# Altium PCB FlightController_20x20.PcbDoc
Units mm, origin at the board's own origin, x right, y up, seen from the top; angles counter-clockwise.
Board outline 26 x 26 mm, 4 copper layers (Top Layer 1, GND, PWR, Bottom Layer 1), stack 0.602 mm thick; 44 components, 36 nets, 217 pads, 53 vias.
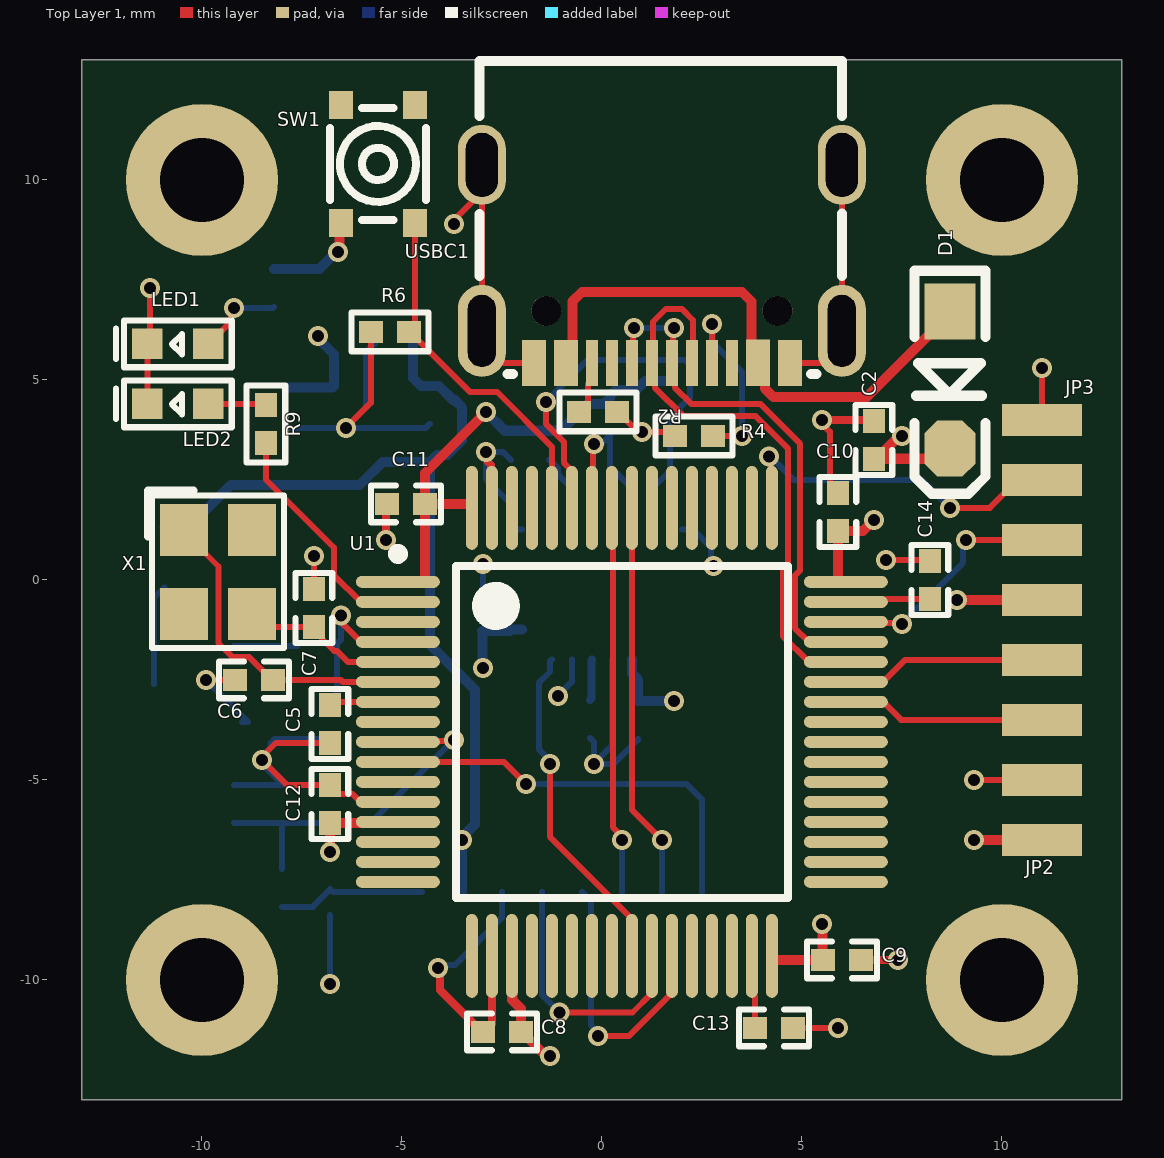
[diagram p0: Top Layer 1 view]
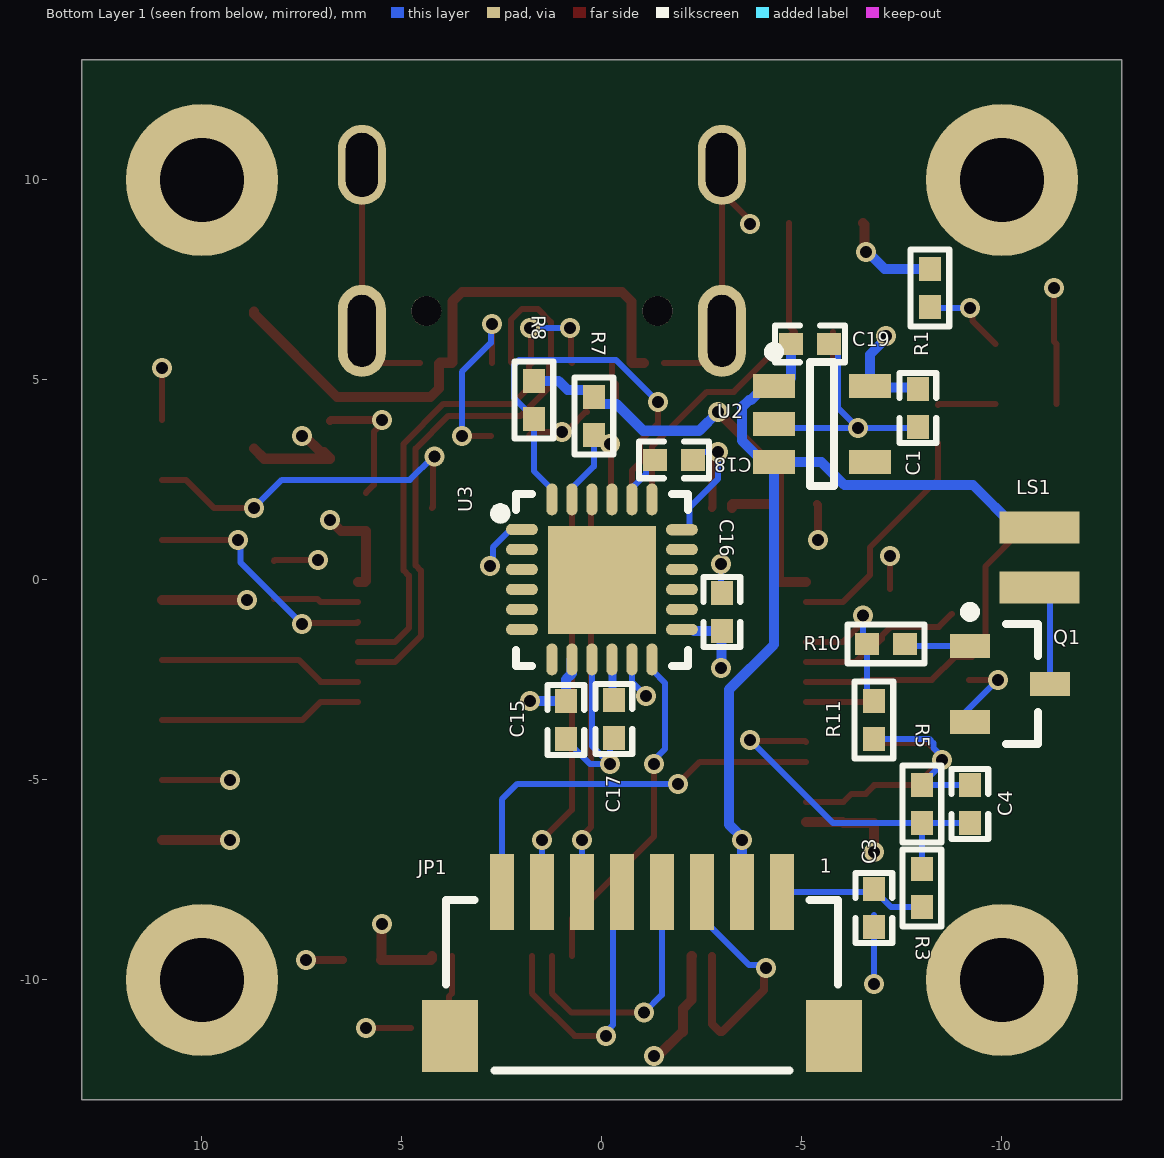
[diagram p1: Bottom Layer 1 view, seen from below]
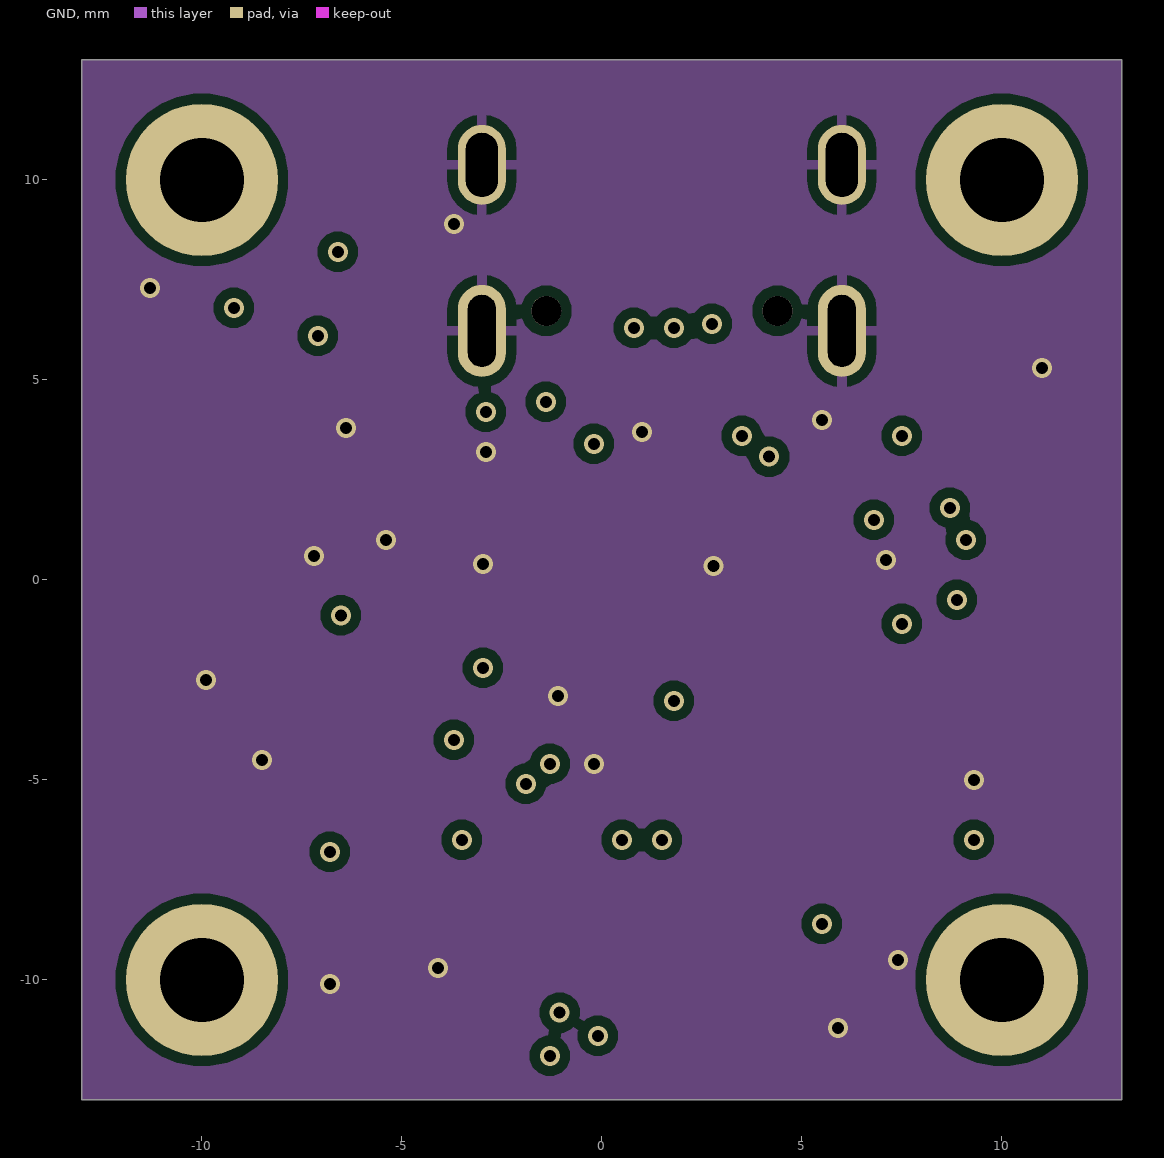
[diagram p2: GND]
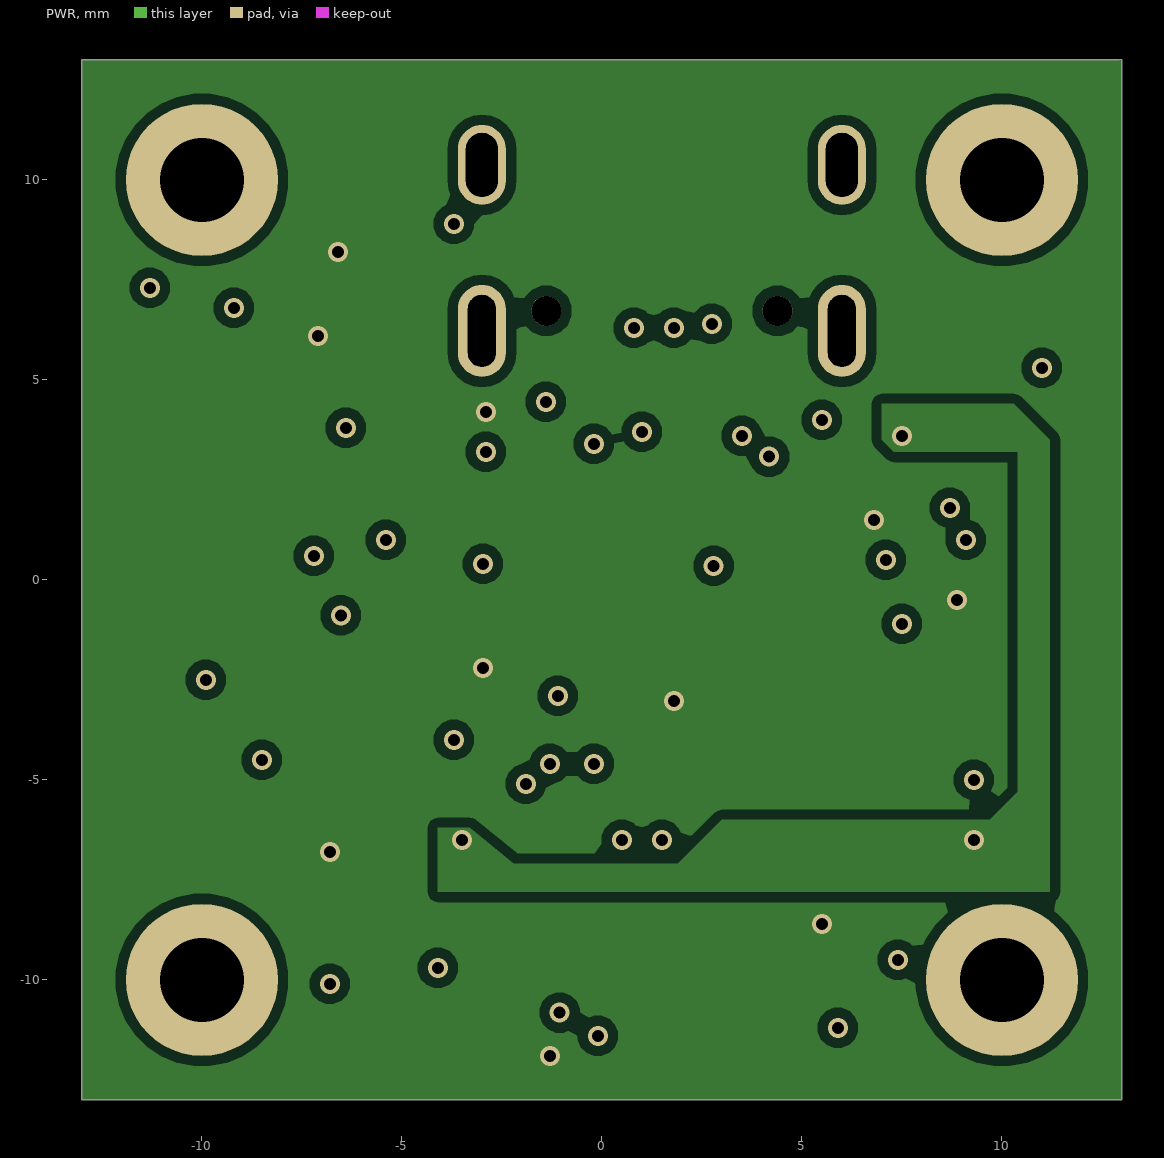
[diagram p3: PWR]
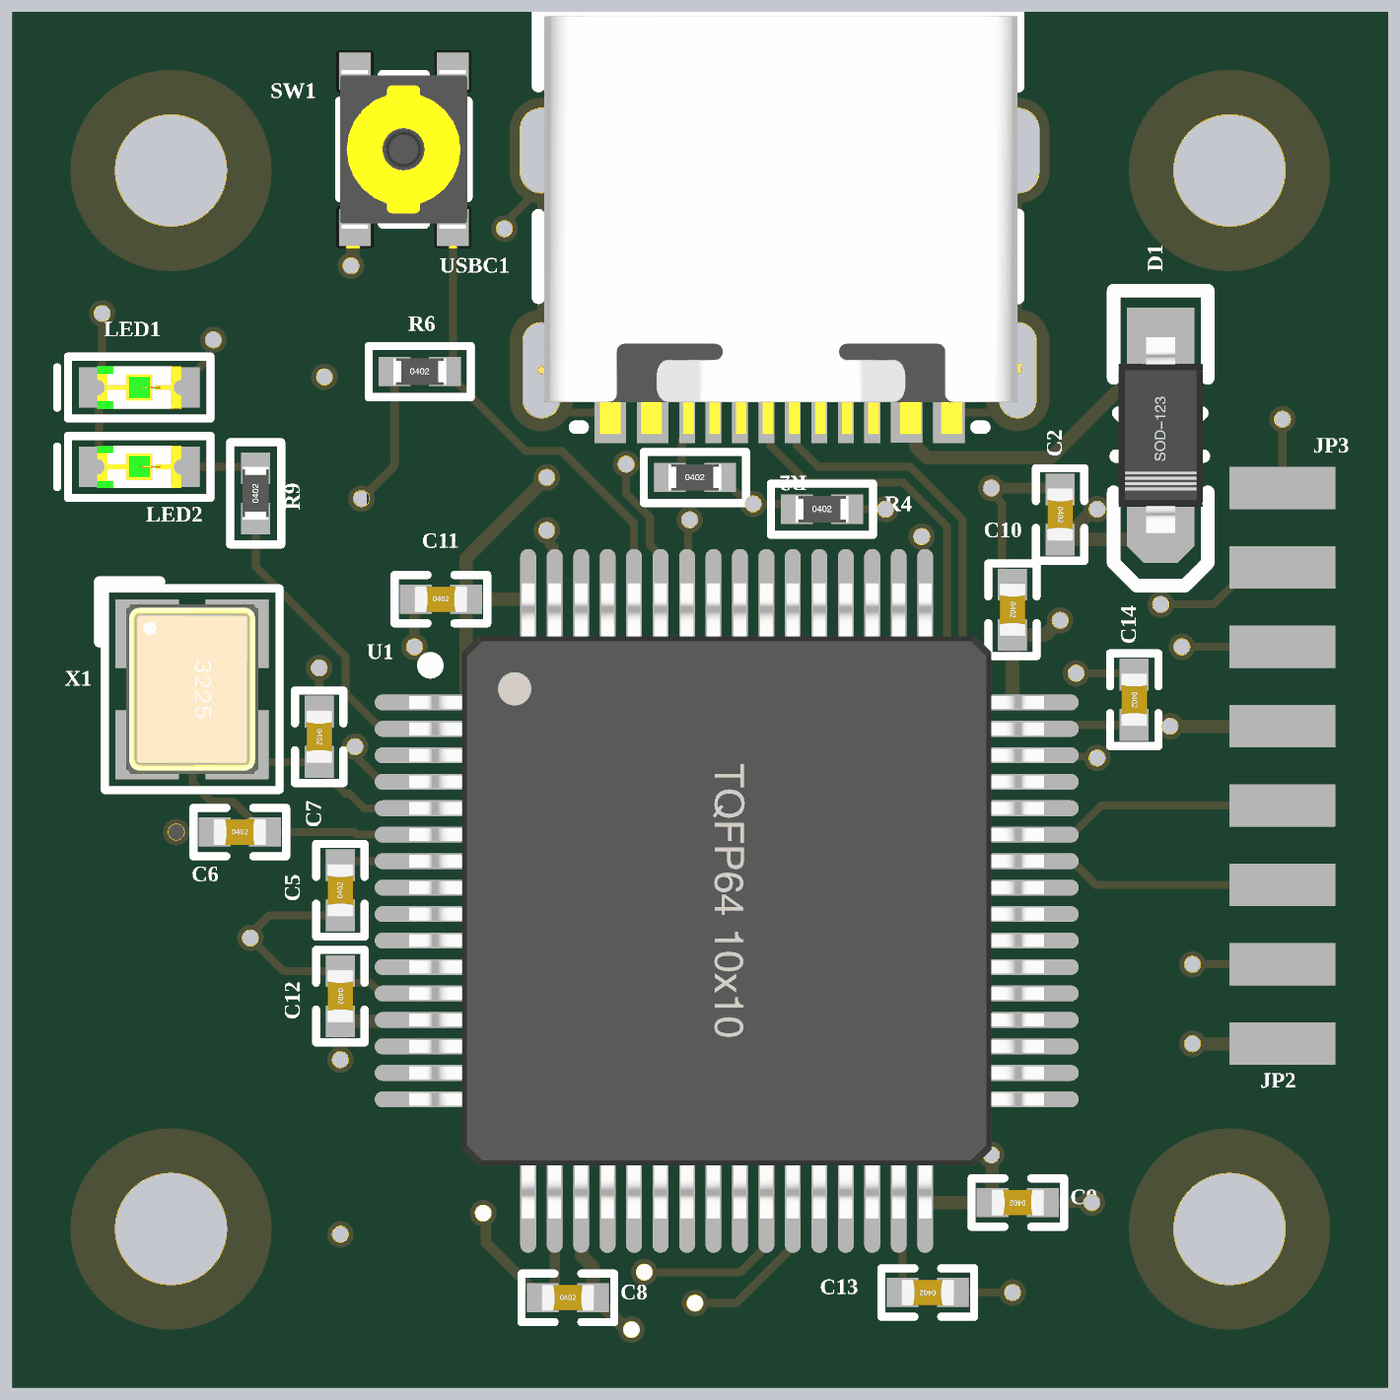
[diagram p4: 3D render of the assembled board from above, using the file's embedded part models]
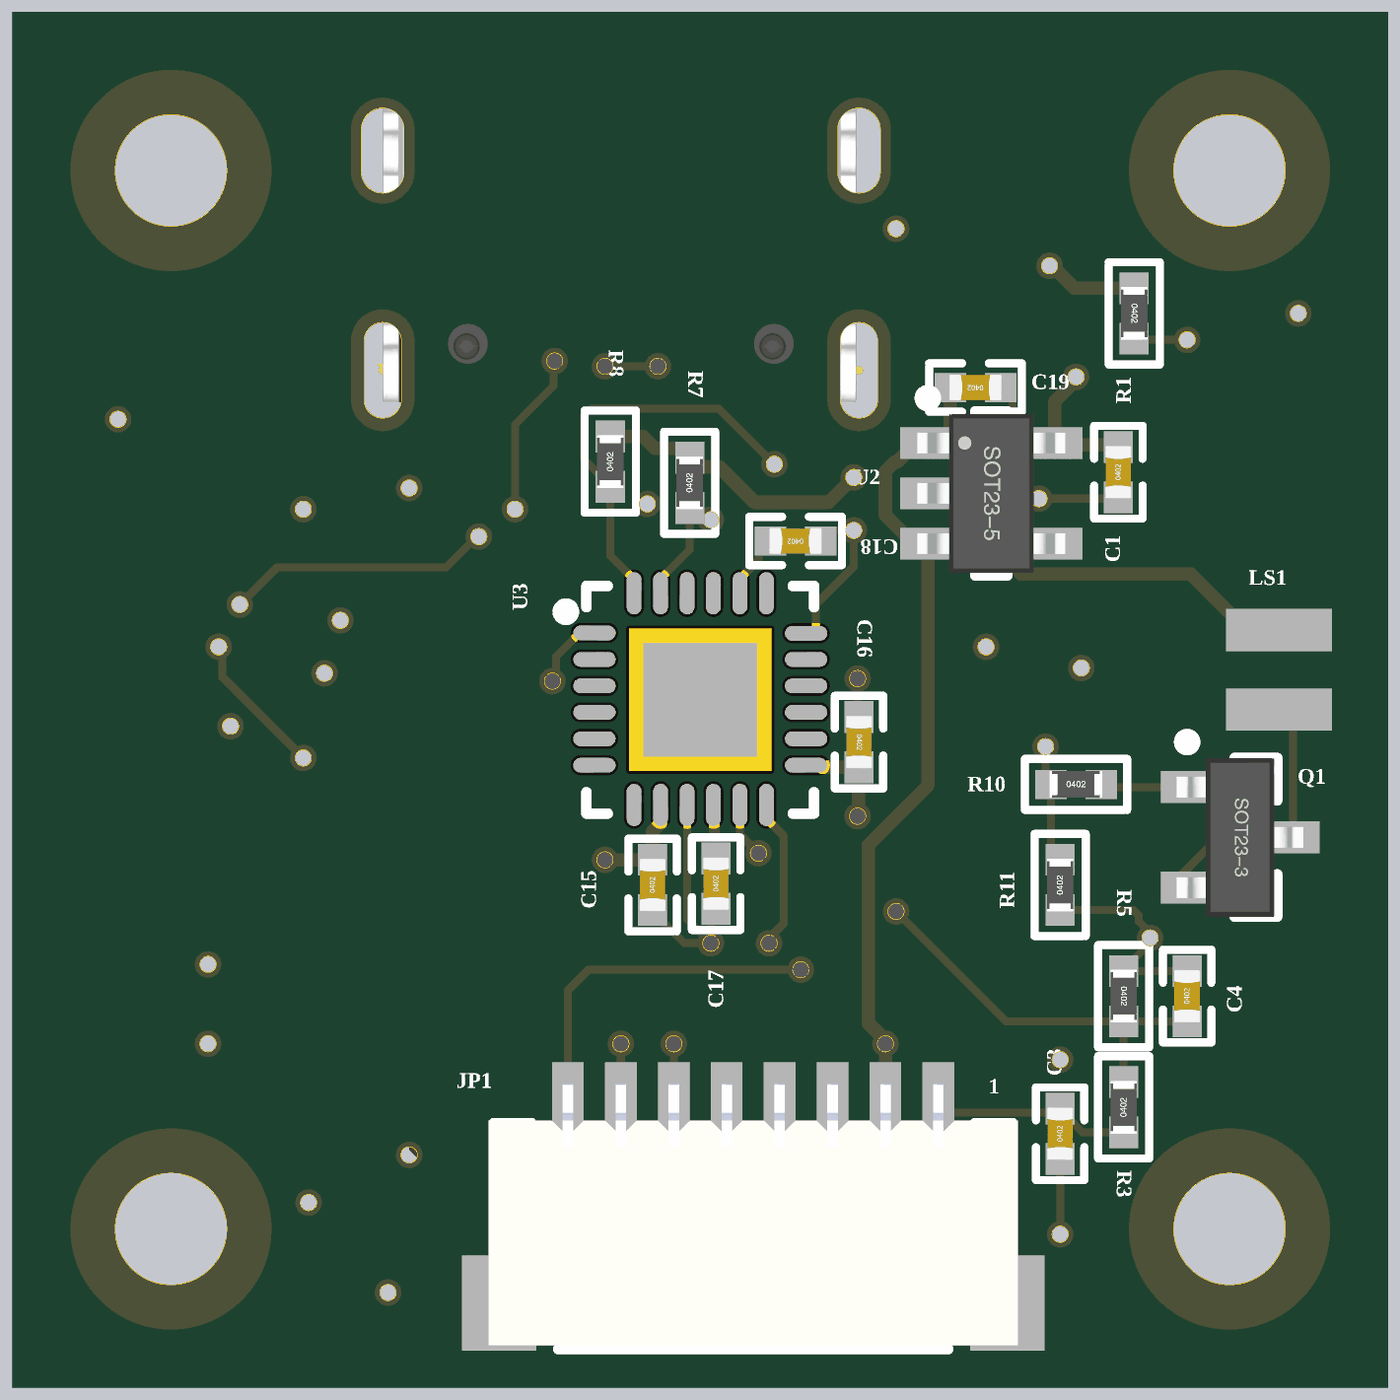
[diagram p5: 3D render of the assembled board from below, using the file's embedded part models]

## Layer stack, top to bottom
Top Solder: solder mask 0.0102, Solder Resist, Dk 3.5
Top Layer 1: signal copper 0.035
Dielectric 2: prepreg 0.0711, PP-006, Dk 4.1
GND: signal copper 0.035
Dielectric 1: dielectric 0.32, FR-4, Dk 4.8
PWR: signal copper 0.035
Dielectric 3: prepreg 0.0711, PP-006, Dk 4.1
Bottom Layer 1: signal copper 0.035
Bottom Solder: solder mask 0.0102, Solder Resist, Dk 3.5

## Board outline
-13,-13 13,-13 13,13 -13,13

## Design rules (kind name [scope] priority, off if disabled: settings)
Clearance Clearance_Polygon [InPolygon] p1: gap=0.25 ignorepadtopadclearanceinfootprint=FALSE
Clearance [All] p2: gap=0.15 ignorepadtopadclearanceinfootprint=FALSE
PolygonConnect PolygonConnect_1 [IsVia] p1: connectstyle=Direct reliefconductorwidth=0.254 reliefentries=4 polygonreliefangle="90 Angle" airgapwidth=0.254
PolygonConnect [All] p2: connectstyle=Relief reliefconductorwidth=0.254 reliefentries=4 polygonreliefangle="90 Angle" airgapwidth=0.254
RoutingVias [All] p1: holewidth=0.3 width=0.5 viastyle="Through Hole" minholewidth=0.3 minwidth=0.5 maxholewidth=0.3 maxwidth=0.5
SolderMaskExpansion [All] p1: expansion=0.102 istentingtop=TRUE
SupplyNets "Schematic Supply Nets_3" [InNet('+5')] p1: voltage=0.000
SupplyNets "Schematic Supply Nets_1" [InNet('GND')] p2: voltage=0.000
SupplyNets "Schematic Supply Nets_2" [InNet('3V3')] p3: voltage=0.000
Width POWER [InNet('+5') Or InNet('3V3') Or InNet('VBUS')] p1: maxlimit=0.5 minlimit=0.254 preferedwidth=0.38
Width Default [All] p2: maxlimit=0.2 minlimit=0.15 preferedwidth=0.254 toplayer_prefwidth=0.15 bottomlayer_prefwidth=0.15 minimp=50.000000 maximp=50.000000 favimp=50.000000
30 further rules are at their usual default settings.

## Classes and differential pairs
component class Power: C1 C2 C3 C4 C19 D1 LED1 R1 R2 R3 R4 R5 U2 USBC1
component class MCU_System: C5 C6 C7 C8 C9 C10 C11 C12 C13 C14 R6 SW1 U1 X1
component class Interfaces: JP1 JP2 JP3 LED2 LS1 Q1 R9 R10 R11
component class IMU_Sensor: C15 C16 C17 C18 R7 R8 U3

## Components (designator, comment, footprint, x,y, rotation, side; value= is the part's Value field where it differs from the comment)
C1 "10u" C0402_M -7.9,4.3 r90 bottom
C2 "10u" C0402_M 6.8,3.5 r270 top
C3 "0.1u" C0402_M -6.8,-8.2 r90 bottom
C4 "0.1u" C0402_M -9.2,-5.6 r90 bottom
C5 "0.1u" C0402_M -6.8,-3.6 r90 top
C6 "18p" C0402_M -8.7,-2.5 r0 top
C7 "18p" C0402_M -7.2,-0.7 r270 top
C8 "0.1u" C0402_M -2.5,-11.3 r0 top
C9 "0.1u" C0402_M 6,-9.5 r180 top
C10 "0.1u" C0402_M 5.9,1.7 r270 top
C11 "0.1u" C0402_M -4.9,1.9 r0 top
C12 "0.1u" C0402_M -6.8,-5.6 r270 top
C13 "2.2u" C0402_M 4.3,-11.2 r180 top
C14 "2.2u" C0402_M 8.2,0 r270 top
C15 "0.1u" C0402_M 0.9,-3.5 r90 bottom
C16 "0.1u" C0402_M -3,-0.8 r270 bottom
C17 "0.1u" C0402_M -0.3,-3.475 r90 bottom
C18 "2.2n" C0402_M -1.8,3 r0 bottom
C19 "10u" C0402_M -5.2,5.9 r0 bottom
D1 "SS34" SOD-123 8.7,5 r270 top
JP1 "Header 8" SH1.0-WT-8P -1.001,-9.601 r180 bottom
JP2 "Header 4" PAD-1X4-SMD 10.119,-4.108 r180 top
JP3 "Header 4" PAD-1X4-SMD 10.119,1.892 r180 top
LED1 "红色" LED0603_R -10.6,5.9 r180 top
LED2 "蓝色" LED0603_B -10.6,4.4 r180 top
LS1 "DC5V" BUZZER -10.8,0.7 r180 bottom
Q1 "SS8050" SOT23-3L -10.2,-2.6 r180 bottom
R1 "1K" R0402_M -8.2,7.3 r270 bottom
R2 "5.1K" R0402_M -0.1,4.2 r0 top
R3 "10K" R0402_M -8,-7.7 r90 bottom
R4 "5.1K" R0402_M 2.3,3.6 r0 top
R5 "1K" R0402_M -8,-5.6 r270 bottom
R6 "10K" R0402_M -5.3,6.2 r0 top
R7 "4.7K" R0402_M 0.2,4.1 r90 bottom
R8 "4.7K" R0402_M 1.7,4.5 r90 bottom
R9 "1K" R0402_M -8.4,3.9 r90 top
R10 "1K" R0402_M -7.1,-1.6 r180 bottom
R11 "10K" R0402_M -6.8,-3.5 r90 bottom
SW1 "3x6x5" SW-SMD-2.8*2.4_4P -5.6,10.4 r90 top
U1 "STM32F405RGT6" TQFP64_M 0.5,-3.8 r0 top
U2 "ME6211C33M5G" SOT-23-5 -5.5,3.9 r180 bottom
U3 "MPU6050" QFN-24_L4.0-W4.0-P0.50-BL-EP2.7 0,0.012 r270 bottom
USBC1 "TYPE-C 2.0 -16P" USB-C-SMD_16P 1.5,7.9 r0 top
X1 "8MHz" OSC-3225-4P -9.6,0.2 r270 top

## Footprints (in the part's own frame and the unit in brackets; to place one, negate y for a bottom-side part, rotate by r counter-clockwise, add the part's x,y. Pads: shape width x height; smd on the part's side, far side on the other; paste and mask are expansions set on the pad)
BUZZER [mm]
  rect 2x0.8 smd: 1(0.135,0.614) 2(0.135,-0.886)
C0402_M [mm] "贴片MLCC电容"
  rect 0.6x0.55 smd: 1(-0.475,0) 2(0.475,0)
  silkscreen extent -0.87,-0.46 0.87,0.46, body extent -0.5,-0.25 0.5,0.25, height 0.5
LED0603_B [mil] "蓝色0603LED"
  rect 30x30 smd: 1(-30,0) 2(30,0)
  silkscreen extent -53,-23 61,23, body extent -31,-16 32,16, height 18
LED0603_R [mil] "红色0603LED"
  rect 30x30 smd: 1(-30,0) 2(30,0)
  silkscreen extent -53,-23 61,23, body extent -31,-16 32,16, height 18
OSC-3225-4P [mm] "3.2*2.5*0.7mm(长宽高)                             淘宝ID:黄晶宝石"
  rect 1.3x1.2 smd: 1(-1.05,-0.85) 2(1.05,-0.85) 3(1.05,0.85) 4(-1.05,0.85)
  silkscreen extent -2.03,-1.75 1.91,1.65, body extent -1.6,-1.25 1.6,1.25, height 0.7
PAD-1X4-SMD [mm]
  rect 2x0.8 smd: 1(-0.881,2.392) 2(-0.881,0.892) 3(-0.881,-0.608) 4(-0.881,-2.108)
QFN-24_L4.0-W4.0-P0.50-BL-EP2.7 [mm]
  oval 0.28x0.8 smd paste-100 mask+0.05: 1(-1.25,-2) 2(-0.75,-2) 3(-0.25,-2) 4(0.25,-2) 5(0.75,-2) 6(1.25,-2) 13(1.25,2) 14(0.75,2) 15(0.25,2) 16(-0.25,2) 17(-0.75,2) 18(-1.242,2)
  oval 0.8x0.28 smd paste-100 mask+0.05: 7(2,-1.25) 8(2,-0.75) 9(2,-0.25) 10(2,0.25) 11(2,0.75) 12(2,1.25) 19(-2,1.25) 20(-2,0.75) 21(-2,0.25) 22(-2,-0.25) 23(-2,-0.75) 24(-2,-1.25)
  rect 2.7x2.7 smd paste-100 mask+0.05: 25(0.012,0)
  silkscreen extent -2.14,-2.79 2.16,2.15
R0402_M [mm] "1/16W贴片电阻"
  rect 0.6x0.55 smd: 1(-0.475,0) 2(0.475,0)
  silkscreen extent -0.97,-0.48 0.97,0.48, body extent -0.5,-0.25 0.5,0.25, height 0.3
SH1.0-WT-8P [mm] "SH1.0连接器-卧贴-8P                联系卖家 免费查找封装"
  rect 1.4x1.8 smd: 0(-4.801,-1.799) 0(4.801,-1.801)
  rect 0.6x1.9 smd: 1(3.499,1.801) 2(2.499,1.801) 3(1.499,1.801) 4(0.499,1.801) 5(-0.501,1.801) 6(-1.501,1.801) 7(-2.501,1.801) 8(-3.501,1.801)
  silkscreen extent -4.9,-2.67 4.9,1.6, body extent -5,-2.6 5,2.35, height 2.9
SOD-123 [mil] "2.7x1.6X1.1mm（长宽高，不包括引脚） 淘宝ID:黄晶宝石"
  rect 55x50 smd: 1(-67.5,0)
  oct 55x50 smd: 2(67.5,0)
  silkscreen extent -108,-35 112,35, body extent -73,-32 73,31, height 50
SOT23-3L [mm] "SOT23, 3-Leads, Body 2.9x1.3mm, Pitch 0.95mm, Lead Span 2.4mm, IPC High Density"
  rect 1x0.6 smd: 1(-1,0.95) 2(-1,-0.95) 3(1,0)
  silkscreen extent -1.13,-1.5 0.7,1.92, body extent -1.2,-1.5 1.2,1.5, height 1.05
SOT-23-5 [mm] "SOT23, 5-Leads, Body 2.9x1.6mm, Pitch 0.95mm, IPC Medium Density"
  rect 1.05x0.6 smd: 1(-1.2,0.95) 2(-1.2,0) 3(-1.2,-0.95) 4(1.2,-0.95) 5(1.2,0.95)
  silkscreen extent -1.32,-1.55 0.3,1.92, body extent -1.4,-1.5 1.4,1.5, height 1.15
SW-SMD-2.8*2.4_4P [mm]
  rect 0.7x0.6 smd mask+0.05: 1(-1.475,0.925) 2(-1.475,-0.925) 3(1.475,-0.925) 4(1.475,0.925)
  silkscreen extent -1.4,-1.2 1.4,1.2, body extent -1.5,-1.19 1.5,1.21, height 0.65
TQFP64_M [mm] "Thin QFP, 64-Leads, Body 10x10mm, Pitch 0.5mm, IPC Low Density"
  oval 2.1x0.3 smd: 1(-5.6,3.75) 2(-5.6,3.25) 3(-5.6,2.75) 4(-5.6,2.25) 5(-5.6,1.75) 6(-5.6,1.25) 7(-5.6,0.75) 8(-5.6,0.25) 9(-5.6,-0.25) 10(-5.6,-0.75) 11(-5.6,-1.25) 12(-5.6,-1.75) 13(-5.6,-2.25) 14(-5.6,-2.75) 15(-5.6,-3.25) 16(-5.6,-3.75) 33(5.6,-3.75) 34(5.6,-3.25) 35(5.6,-2.75) 36(5.6,-2.25) 37(5.6,-1.75) 38(5.6,-1.25) 39(5.6,-0.75) 40(5.6,-0.25) 41(5.6,0.25) 42(5.6,0.75) 43(5.6,1.25) 44(5.6,1.75) 45(5.6,2.25) 46(5.6,2.75) 47(5.6,3.25) 48(5.6,3.75)
  oval 0.3x2.1 smd: 17(-3.75,-5.6) 18(-3.25,-5.6) 19(-2.75,-5.6) 20(-2.25,-5.6) 21(-1.75,-5.6) 22(-1.25,-5.6) 23(-0.75,-5.6) 24(-0.25,-5.6) 25(0.25,-5.6) 26(0.75,-5.6) 27(1.25,-5.6) 28(1.75,-5.6) 29(2.25,-5.6) 30(2.75,-5.6) 31(3.25,-5.6) 32(3.75,-5.6) 49(3.75,5.6) 50(3.25,5.6) 51(2.75,5.6) 52(2.25,5.6) 53(1.75,5.6) 54(1.25,5.6) 55(0.75,5.6) 56(0.25,5.6) 57(-0.25,5.6) 58(-0.75,5.6) 59(-1.25,5.6) 60(-1.75,5.6) 61(-2.25,5.6) 62(-2.75,5.6) 63(-3.25,5.6) 64(-3.75,5.6)
  silkscreen extent -5.72,-4.15 4.15,4.57, body extent -6,-6 6,6, height 1.05
USB-C-SMD_16P [mm] "封装库来自淘宝ID:黄晶宝石"
  oval 1.2x2.3 hole 0.7 slot 1.8 at 90 deg: 0(-4.5,-1.675) 0(4.5,-1.675)
  oval 1.2x2 hole 0.8 slot 1.6 at 90 deg: 0(-4.5,2.475) 0(4.5,2.475)
  rect 0.3x1.15 smd: A1(3.35,-2.473) A4(2.55,-2.471) A5(1.25,-2.475) A6(0.25,-2.475) A7(-0.25,-2.473) A9(-2.55,-2.475) A12(-3.35,-2.475) B1(-3.05,-2.475) B4(-2.25,-2.475) B5(-1.75,-2.475) B6(-0.75,-2.475) B7(0.75,-2.473) B9(2.25,-2.471) B12(3.05,-2.473)
  rect 0.3x1.148 smd: A8(1.75,-2.475) B8(-1.25,-2.475)
  round 0.75 hole 0.75 unplated: ""(-2.89,-1.175) ""(2.89,-1.175)
  silkscreen extent -4.56,-2.75 4.5,5.08, body extent -4.45,-2.87 4.49,5.03, height 3.25

## Part data
C1 C2 C3 C4 C5 C6 C7 C8 C9 C10 C11 C12 C13 C14 C15 C16 C17 C18 C19: library part C, "贴片电容/MLCC电容", BOM名称=无极性贴片电容, 当前库版本V2022.12.25 @淘宝卖家:黄晶宝石=最新版本发布https://shop463601444.taobao.com
D1: "肖特基二极管", BOM名称=肖特基二极管, 属性=40V/3A, 当前库版本V2022.12.25 @淘宝卖家:黄晶宝石=最新版本发布https://shop463601444.taobao.com
JP1: "Header, 8-Pin", Publisher="Altium Limited", Revision="17-Jul-2002: Re-released for DXP Platform."
JP2 JP3: "Header, 4-Pin", Publisher="Altium Limited", Revision="17-Jul-2002: Re-released for DXP Platform."
LED1 LED2: library part LED, "贴片LED", BOM名称=贴片LED, 封装库来自淘宝卖家：黄晶宝石=其他店铺购入均为盗版封装库，无更新权益，请立即申请退款，本店现金奖励200~1000元
LS1: library part BEEP, "蜂鸣器", BOM名称=蜂鸣器, 联系下单店铺卖家 免费技术支持="联系下单店铺卖家 免费帮你查找封装"
Q1: library part 8050-SMD, "高频放大-NPN型", BOM名称=高频放大-NPN型, 参数="40V 1.5A 1W 100MHZ", 联系下单店铺卖家 免费帮你查找封装="联系下单店铺卖家 免费技术支持"
R1 R2 R3 R4 R5 R6 R7 R8 R9 R10 R11: library part R, "贴片电阻", BOM名称=贴片电阻, 联系下单店铺卖家 免费帮你查找封装="联系下单店铺卖家 免费技术支持"
SW1: library part SW-PB, "微动开关", BOM名称=3x6轻触开关, 联系下单店铺卖家 免费技术支持="联系下单店铺卖家 免费帮你查找封装"
U1: "ARM Cortex-M4 32b MCU+FPU, 210DMIP, 1024 kB Flash, 192+4 kB RAM, 51 I/Os, 64-pin LQFP, -40 to +85癈, Tray", Operating Frequency (Processor Speed)=168MHz, 16-bit Timers (IC/OC/PWM)=12x16-bit(24/24/30), 32-bit Timer (IC/OC/PWM)="2x32-bit (8/8/8)", A/D Converter=16x12-bit, ComponentLink1Description="Manufacturer URL", ComponentLink1URL=http://www.st.com/, ComponentLink2Description="STM32F405/7 Datasheet", ComponentLink2URL=http://www.st.com/internet/com/TECHNICAL_RESOURCES/TECHNICAL_LITERATURE/DATASHEET/DM00037051.pdf, ComponentLink3Description="STM32F4 Web Page", ComponentLink3URL=http://www.st.com/internet/mcu/subclass/1521.jsp, D/A Converter=2x12-bit, DatasheetVersion="rev2, Jan-2012", Internal RAM=192kB, Other Timer Functions="2xWDG, RTC, 24-bit down counter", PackageDescription="64-Pin Low Profile Quad Flat Package, 10x10 mm Body, 0.5 mm Pitch", PackageReference=TQFP64, PackageVersion=2012, Serial Interface="3xSPI/2xI2S/2xI2C/3xUSART(IrDa, ISO7816)/3xUART/1xUSB OTG FS/HS, 2xCAN/ SDIO", 联系卖家，免费查找封装=唯一出售店铺网址https://shop463601444.taobao.com
U2: library part ME6211C33, "LDO 3.3V/0.5A", BOM名称=RT9193-30GB, 当前库版本V2022.12.25 @淘宝卖家:黄晶宝石=最新版本发布https://shop463601444.taobao.com
U3: "三轴加速度+三轴陀螺仪", BOM名称=MPU6050, 封装库来自淘宝卖家：黄晶宝石=其他店铺购入均为盗版封装库，请立即申请退款，本店现金奖励100~500元
USBC1: library part USB2.0_Type-C_16Pin, "USB2.0_Type-C_16Pin母座", 当前库版本V2022.12.25 @淘宝卖家:黄晶宝石=最新版本发布https://shop463601444.taobao.com
X1: library part XTAL-2P, "2脚无源晶振(谐振器）", BOM名称=2脚无源晶振(谐振器）, 联系下单店铺卖家 免费帮你查找封装="联系下单店铺卖家 免费技术支持"

## Free pads (board coordinates)
  round 3.8 hole 2.1: ""(-10,-10) ""(-10,10) ""(10,-10) ""(10,10)

## Via types
v1: diameter 0.5, hole 0.3, Top Layer 1 to Bottom Layer 1, tented both sides, 53 vias

## Nets (pads, with @x,y where several pads share a name; then routed paths per layer and width w, separated by ;. In a path a pad name is that pad's centre, name@x,y a point inside that pad or via, vN(x,y) a via of type N, cw(c..) or ccw(c..) an arc to the next point about the centre after c; other vN are vias at no path point)
3V3: C1.2 C8.2 C9.2 C10.2 C11.2 C12.2 C15.2 C16.2 JP3.1 R1.1 R7.2 R8.2 SW1.1 U1.1 U1.13 U1.19 U1.32 U1.48 U1.64 U2.5 U3.8 U3.13 | length 33.6
  Top Layer 1 w0.254: v1(-6.8,-6.8) C12.2 -6.037,-6.075 -6.012,-6.05 U1.13 ; v1(-6.6,8.2) -6.563,8.237 -6.563,8.888 SW1.1 ; U1.1 -4.446,-0.05 -4.425,-0.029 C11.2 ; U1.64 -3.25,1.879 -3.271,1.9 C11.2 ; v1(-2.9,4.2) -4.425,2.675 C11.2 ; U1.19 -2.241,-9.409 -2.241,-10.502 -2.025,-10.719 C8.2 -2,-11.3 -1.447,-11.853 -1.347,-11.853 v1(-1.3,-11.9) ; U1.32 4.25,-9.479 4.271,-9.5 C9.2 5.513,-9.487 5.513,-8.613 v1(5.5,-8.6) ; U1.48 5.921,-0.05 5.9,-0.029 C10.2 6.525,1.225 v1(6.8,1.5) ; v1(8.875,-0.5) JP3.1
  Bottom Layer 1 w0.254: R1.1 -7.067,7.775 -6.642,8.2 v1(-6.6,8.2) ; C1.2 -7.862,4.812 -6.738,4.812 U2.5 -6.7,5.633 -7.1,6.033 v1(-7.1,6.1) ; v1(-2.973,-2.2) -2.986,-2.187 -2.986,-1.288 C16.2 -2.305,-1.275 -2.267,-1.237 U3.13 ; v1(-2.9,4.2) -2.43,3.73 -1.03,3.73 -0.358,4.402 0.052,4.402 0.2,4.55 R7.2 0.2,4.6 0.348,4.748 0.856,4.748 1.083,4.975 R8.2 ; U3.8 0.755,-1.993 0.755,-2.342 0.9,-2.487 C15.2 v1(1.8,-3.025)
+5: C2.2 C19.2 D1.2 JP1.2 JP2.1 LS1.1 U2.1 U2.3 | length 27.6
  Top Layer 1 w0.254: v1(7.5,3.6) 7.433,3.6 7.031,3.198 6.948,3.198 6.8,3.05 C2.2 6.803,3.028 8.443,3.028 D1.2 ; v1(9.3,-6.5) JP2.1
  Bottom Layer 1 w0.254: LS1.1 -10.335,1.314 -9.276,2.373 -6.06,2.373 -5.483,2.95 U2.3 ; C19.2 -4.725,5.05 -4.525,4.85 U2.1 -4.075,4.85 -3.719,4.494 -3.678,4.494 -3.498,4.315 -3.498,3.485 -3.86,3.123 -4.127,3.123 U2.3 ; JP1.2 v1(-3.5,-6.5) -3.5,-6.433 -3.173,-6.106 -3.173,-2.745 -4.3,-1.618 U2.3
BAT_ADC: C4.1 R3.2 R5.2 U1.9 | length 8.9
  Top Layer 1 w0.15: U1.9 -5.075,-4.025 -3.725,-4.025 v1(-3.7,-4)
  Bottom Layer 1 w0.15: C4.1 R5.2 ; R3.2 R5.2 ; v1(-3.7,-4) -5.775,-6.075 R5.2
BOOT0: R6.2 SW1.2 U1.60 | length 9.1
  Top Layer 1 w0.15: SW1.2 -4.675,6.35 R6.2 -4.8,6.2 -3.3,4.7 -2.624,4.7 -1.25,3.326 U1.60
BUZZER: R10.1 R11.2 U1.4 | length 4.1
  Top Layer 1 w0.15: v1(-6.525,-0.886) -6.458,-0.953 -6.458,-1.122 -6.03,-1.55 U1.4
  Bottom Layer 1 w0.15: R11.2 -6.625,-2.85 R10.1 -6.525,-1.5 v1(-6.525,-0.886)
CPOUT: C18.2 U3.20 | length 1.2
  Bottom Layer 1 w0.15: C18.2 -1.3,3 -1.1,2.8 -1.1,2.639 -0.75,2.289 U3.20
CURR_ADC: JP1.8 U1.10 | length 10.3
  Top Layer 1 w0.15: U1.10 -2.45,-4.55 v1(-1.9,-5.1)
  Bottom Layer 1 w0.15: v1(-1.9,-5.1) 2.112,-5.1 2.5,-5.488 JP1.8
GND: C1.1 C2.1 C3.1 C4.2 C5.1 C6.1 C7.1 C8.1 C9.1 C10.1 C11.1 C12.1 C13.1 C14.1 C15.1 C16.1 C17.1 C18.1 C19.1 JP1.3 JP2.2 JP3.4 LED1.2 LED2.2 Q1.2 R2.2 R4.1 R5.1 R6.1 R11.1 U1.12 U1.18 U1.63 U2.2 U3.1 U3.9 U3.11 U3.18 USBC1.0 USBC1.A1 USBC1.A12 USBC1.B1 USBC1.B12 | length 71.9
  Top Layer 1 w0.15: LED2.2 LED1.2 -11.3,5.962 v1(-11.3,7.3) ; v1(-9.9,-2.5) C6.1 ; C7.1 v1(-7.2,0.6) ; C5.1 -8.147,-4.075 -8.5,-4.428 v1(-8.5,-4.5) -7.875,-5.125 C12.1 -6.8,-5.15 -6.6,-5.35 -6.241,-5.35 -6.041,-5.55 U1.12 ; v1(-6.4,3.8) -5.775,4.425 R6.1 ; v1(-3.7,8.9) -3.7,8.995 -3,9.695 -3,10.375 -3,6.225 -3,5.959 -2.466,5.425 USBC1.A12 USBC1.B1 ; R2.2 0.4,4.2 0.833,3.767 0.933,3.767 v1(1,3.7) 1.725,3.7 R4.1 ; USBC1.B12 USBC1.A1 5.467,5.427 6,5.959 6,6.225 USBC1.0@6,10.375 ; C13.1 v1(5.9,-11.2) ; v1(5.5,4) 5.5,3.905 5.7,3.705 5.7,2.375 C10.1 ; v1(7.1,0.5) 8.175,0.5 C14.1 ; v1(9.3,-5) JP2.2 ; JP3.4 v1(11,5.3)
  Top Layer 1 w0.2: v1(-5.4,1) -5.4,1.875 C11.1 ; v1(-4.1,-9.7) -4.05,-9.75 -4.05,-10.25 -3,-11.3 C8.1 ; C8.1@-2.95,-11.3 -2.75,-11.1 U1.18 ; v1(-2.9,3.2) -2.843,3.143 -2.843,2.943 -2.769,2.869 -2.769,1.819 U1.63 ; v1(5.5,4) 6.775,4 C2.1 ; C9.1 v1(7.4,-9.5)
  Bottom Layer 1 w0.15: v1(-9.9,-2.5) -8.85,-3.55 Q1.2@-9,-3.55 ; C4.2 R5.1 -8,-5.1 -8.433,-4.667 -8.433,-4.567 v1(-8.5,-4.5) -8.5,-4.405 -8.286,-4.192 -8.286,-4.081 -8.18,-3.975 R11.1 ; C1.1 -7.875,3.8 v1(-6.4,3.8) ; v1(-6.8,-10.1) C3.1 -6.8,-8.375 ; C19.1 -5.7,5.9 -5.9,5.7 -5.9,4.3 v1(-6.4,3.8) ; U2.2 -4.4,3.8 v1(-6.4,3.8) ; v1(-4.1,-9.7) -4.033,-9.633 -3.683,-9.633 -2.5,-8.45 JP1.3 ; C16.1 -2.973,-0.298 v1(-2.973,0.4) ; C18.1 -2.475,3.2 v1(-2.9,3.2) -2.9,2.517 -2.185,1.802 -2.185,1.315 -2.125,1.255 U3.18 ; v1(-1.1,-2.9) -0.75,-2.55 U3.11 ; C17.1 -0.2,-4.05 v1(-0.2,-4.6) ; U3.9 0.25,-4.15 v1(-0.2,-4.6) ; C15.1 0.9,-4 0.3,-4.6 v1(-0.2,-4.6) ; U3.1 2.276,1.262 2.726,0.813 2.726,0.419 v1(2.793,0.352)
I2C1_SCL: R7.1 U1.58 U3.23 | length 4
  Top Layer 1 w0.15: U1.58 -0.225,1.825 -0.225,3.375 v1(-0.2,3.4)
  Bottom Layer 1 w0.15: v1(-0.2,3.4) 0,3.4 0.2,3.6 R7.1 0.2,2.839 0.75,2.289 U3.23
I2C1_SDA: R8.1 U1.59 U3.24 | length 10.8
  Top Layer 1 w0.15: v1(-1.4,4.45) -1.4,3.9 -0.95,3.45 -0.95,2.93 -0.75,2.73 U1.59
  Bottom Layer 1 w0.15: v1(-1.4,4.45) -0.35,5.5 1.644,5.5 2.068,5.5 2.2,5.368 2.2,4.944 2.2,4.55 1.7,4.05 R8.1 1.7,2.723 1.25,2.272 U3.24
IMU_INT: U1.25 U3.12 | length 8.5
  Top Layer 1 w0.15: v1(-1.3,-4.6) -1.3,-6.42 0.75,-8.47 U1.25
  Bottom Layer 1 w0.15: v1(-1.3,-4.6) -1.3,-4.505 -1.575,-4.23 -1.575,-2.573 -1.292,-2.29 -1.292,-2.03 U3.12
LED_STATUS: R9.1 U1.2 | length 5.9
  Top Layer 1 w0.15: R9.1 -8.4,2.51 -6.7,0.81 -6.7,0.12 -6.03,-0.55 U1.2
M1: JP1.4 U1.26 | length 6.6
  Top Layer 1 w0.15: v1(-1.057,-10.815) 0.765,-10.815 1.25,-10.33 U1.26
  Bottom Layer 1 w0.15: JP1.4 -1.5,-10.372 v1(-1.057,-10.815)
M2: JP1.5 U1.27 | length 7
  Top Layer 1 w0.15: v1(-0.1,-11.4) 0.68,-11.4 1.75,-10.33 U1.27
  Bottom Layer 1 w0.15: JP1.5 -0.275,-8.025 -0.275,-11.13 -0.1,-11.305 v1(-0.1,-11.4)
M3: JP1.6 U1.57 | length 9.7
  Top Layer 1 w0.15: U1.57 0.275,1.775 0.275,-6.18 0.5,-6.405 v1(0.5,-6.5)
  Bottom Layer 1 w0.15: JP1.6 v1(0.5,-6.5)
M4: JP1.7 U1.56 | length 9.9
  Top Layer 1 w0.15: U1.56 0.75,-5.75 v1(1.5,-6.5)
  Bottom Layer 1 w0.15: JP1.7 v1(1.5,-6.5)
NetC13_2: C13.2 U1.31 | length 1.8
  Top Layer 1 w0.15: U1.31 3.75,-10.341 3.825,-10.416 C13.2
NetC14_2: C14.2 U1.47 | length 2.1
  Top Layer 1 w0.15: U1.47 7.041,-0.55 7.116,-0.475 C14.2
NetLED1_1: LED1.1 R1.2 | length 2.2
  Top Layer 1 w0.15: LED1.1 -9.267,6.471 -9.267,6.733 v1(-9.2,6.8)
  Bottom Layer 1 w0.15: v1(-9.2,6.8) -8.225,6.8 R1.2
NetLED2_1: LED2.1 R9.2 | length 1.4
  Top Layer 1 w0.15: LED2.1 -8.425,4.4 R9.2
NetLS1_2: LS1.2 Q1.3 | length 2.5
  Bottom Layer 1 w0.15: Q1.3 -11.2,-0.451 LS1.2
NetQ1_1: Q1.1 R10.2 | length 1.6
  Bottom Layer 1 w0.15: Q1.1 -7.625,-1.65 R10.2
NetR2_1: R2.1 USBC1.B5 | length 1.4
  Top Layer 1 w0.15: R2.1 -0.55,4.2 -0.35,4.4 -0.35,4.9 -0.25,5 USBC1.B5
NetR4_2: R4.2 USBC1.A5 | length 4.8
  Top Layer 1 w0.15: USBC1.A5 v1(2.75,6.4) ; R4.2 v1(3.5,3.6)
  Bottom Layer 1 w0.15: v1(2.75,6.4) 2.775,6.375 2.775,5.925 3.5,5.2 v1(3.5,3.6)
NRST: C5.2 U1.7 | length 1.8
  Top Layer 1 w0.15: C5.2@-6.9,-3.025 -6.875,-3.05 U1.7
PH0: C7.2 U1.5 X1.3 | length 4.2
  Top Layer 1 w0.15: X1.3 -8.425,-1.175 C7.2 ; C7.2@-7.2,-1.2 -7,-1.4 -7,-1.472 -6.697,-1.775 -6.625,-1.775 -6.35,-2.05 U1.5
PH1: C6.2 U1.6 X1.1 | length 8.1
  Top Layer 1 w0.15: X1.1 -10.45,1.2 -9.586,0.336 -9.586,-1.582 -9.247,-1.922 -8.828,-1.922 -8.25,-2.5 C6.2 -6.532,-2.5 -6.482,-2.55 U1.6
REGOUT: C17.2 U3.10 | length 1
  Bottom Layer 1 w0.2: C17.2 -0.265,-2.965 -0.265,-2.003 U3.10
RX1: JP2.4 U1.43 | length 5.1
  Top Layer 1 w0.15: U1.43 7.03,-2.55 7.58,-2 JP2.4
SWCLK: JP3.3 U1.49 | length 8.9
  Top Layer 1 w0.15: v1(4.183,3.083) 4.221,3.045 4.221,1.829 U1.49 ; v1(8.7,1.8) 9.7,1.8 10.4,2.5 JP3.3
  Bottom Layer 1 w0.15: v1(4.183,3.083) 4.217,3.083 4.8,2.5 8,2.5 v1(8.7,1.8)
SWDIO: JP3.2 U1.46 | length 6.1
  Top Layer 1 w0.15: U1.46 6.125,-1.075 7.475,-1.075 v1(7.5,-1.1) ; v1(9.1,1) JP3.2
  Bottom Layer 1 w0.15: v1(7.5,-1.1) 9.033,0.433 9.033,0.933 v1(9.1,1)
TX1: JP2.3 U1.42 | length 5.1
  Top Layer 1 w0.15: U1.42 7.03,-3.05 7.48,-3.5 JP2.3
USB_DN: U1.44 USBC1.A7 USBC1.B7 | length 14.6
  Top Layer 1 w0.15: USBC1.B7 2.275,5.452 2.275,6.497 1.997,6.775 1.603,6.775 1.275,6.447 1.275,5.452 USBC1.A7 1.325,5.352 1.325,4.807 2.032,4.1 3.838,4.1 4.658,3.28 4.658,0.363 4.525,0.23 4.525,-1.405 5.17,-2.05 U1.44
USB_DP: U1.45 USBC1.A6 USBC1.B6 | length 13.2
  Top Layer 1 w0.15: USBC1.B6 0.775,5.45 0.775,6.275 v1(0.8,6.3) ; v1(1.8,6.3) 1.775,6.275 1.775,5.45 USBC1.A6 1.825,5.35 1.825,4.809 2.234,4.4 3.962,4.4 4.958,3.404 4.958,0.238 4.825,0.105 4.825,-1.205 5.17,-1.55 U1.45
  Bottom Layer 1 w0.15: v1(0.8,6.3) v1(1.8,6.3)
VBAT: C3.2 JP1.1 R3.1 | length 3.7
  Bottom Layer 1 w0.15: R3.1 -7.225,-8.175 -6.8,-7.75 C3.2 -6.725,-7.8 JP1.1
VBUS: D1.1 USBC1.A4 USBC1.A9 USBC1.B4 USBC1.B9 | length 14.6
  Top Layer 1 w0.254: USBC1.A9 USBC1.B4 -0.738,5.437 -0.738,6.962 -0.5,7.2 3.5,7.2 3.738,6.962 3.738,5.441 USBC1.B9 USBC1.A4 4.073,5.406 4.073,4.787 4.285,4.575 6.624,4.575 8.7,6.651 D1.1
pads on no net: JP1.0 SW1.3 SW1.4 U1.3 U1.8 U1.11 U1.14 U1.15 U1.16 U1.17 U1.20 U1.21 U1.22 U1.23 U1.24 U1.28 U1.29 U1.30 U1.33 U1.34 U1.35 U1.36 U1.37 U1.38 U1.39 U1.40 U1.41 U1.50 U1.51 U1.52 U1.53 U1.54 U1.55 U1.61 U1.62 U2.4 U3.2 U3.3 U3.4 U3.5 U3.6 U3.7 U3.14 U3.15 U3.16 U3.17 U3.19 U3.21 U3.22 U3.25 USBC1. USBC1.A8 USBC1.B8 X1.2 X1.4

## Polygon pours and split planes (outlines as drawn)
3V3 on PWR "3V3_L03_P008" (solid, remove dead copper, pour order 8): -13,13 -13,-13 13,-13 13,13.1 12.9,13
+5 on PWR "+5_L03_P007" (solid, remove dead copper, pour order 7): 10.4,3.2 10.4,-5.3 9.7,-6 3,-6 1.9,-7.1 -2.2,-7.1 -3.3,-6.2 -4.1,-6.2 -4.1,-7.8 -2.5,-7.8 11.2,-7.8 11.2,3.5 10.3,4.4 7,4.4 7,3.5 7.3,3.2
GND on GND "GND_L02_P002" (solid, remove dead copper, pour order 2): -13,13 13,13 13,-13 -13,-13

## Text inside footprints (layer, text, board x,y; h text height)
JP1: Bottom Overlay "1" at -5.446,-7.442 h0.6